# EAGLE board PCB_V1 (EAGLE 9.6.2)
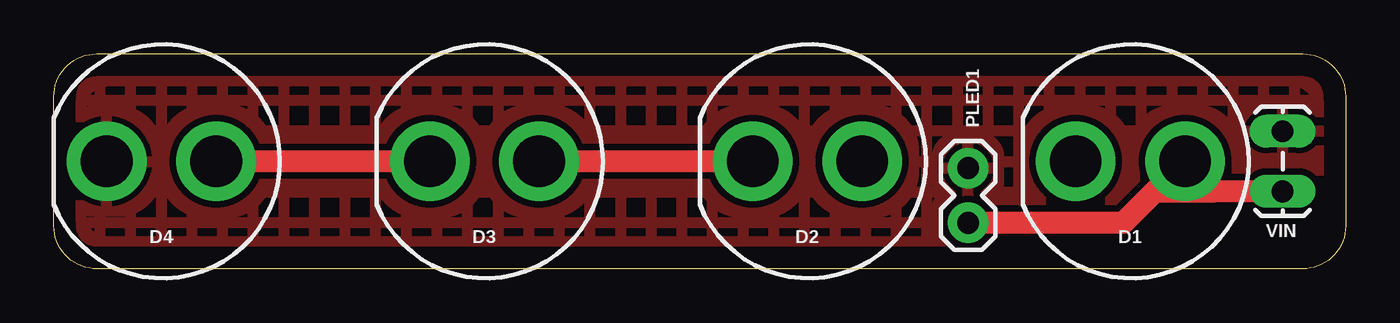
[diagram p0: board, top side]
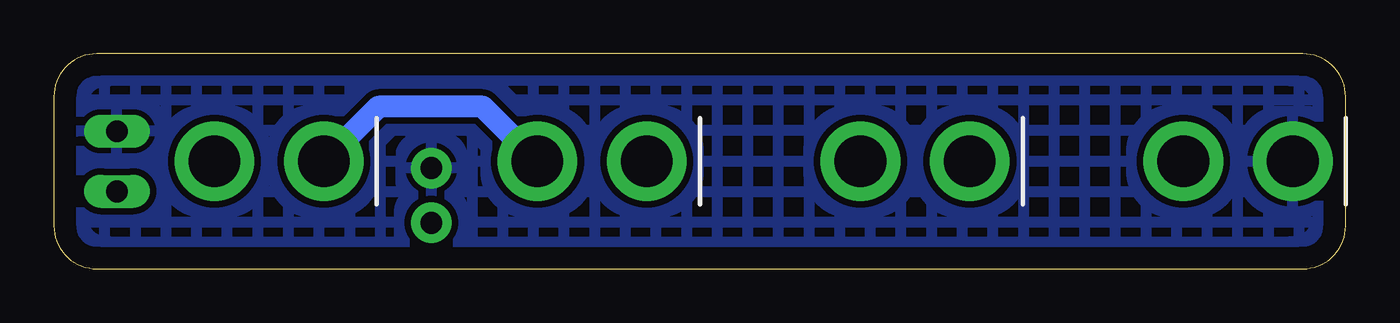
[diagram p1: board, bottom side, seen from below]

Size 60 x 10 mm. Coordinates in mm from the lower left corner, seen from the top.
Outline: 2,10 58,10 arc-90 60,8 60,2 arc-90 58,0 2,0 arc-90 0,2 0,8 arc-90 2,10
Copper layers (1*16): Top 0.035mm / dielectric 1.5mm / Bottom 0.035mm
Design rules "default": minimum track width 6mil, minimum drill 0.35mm, track to track 6mil, track to pad 6mil, pad to pad 6mil, via to via 6mil, smd to smd 6mil, copper to edge 40mil, drill to drill 6mil, minimum pad ring 10mil, minimum via ring 8mil, stop-mask expansion 4mil, vias tented up to drill 0mil, thermal gap 10mil

## Footprints (pad centres in the part's own frame; a part is rotated, then mirrored left to right if it is on the bottom)
LED_10MM = drill 2.4 pad 3.7: A 2.54,0; C -2.54,0
1X02 = drill 1.016 pad 1.88: 1 0,0; 2 2.54,0
1X02_LOCK_LONGPADS = drill 1.016 long: 1 -0.127,0; 2 2.667,0

## Placement (x,y rotation side)
D1  [LED_10MM]  50,5 0 top
D2  [LED_10MM]  35,5 0 top
D3  [LED_10MM]  20,5 0 top
D4  [LED_10MM]  5,5 0 top
PLED1  [1X02]  42.47,2.14 90 top
VIN  [1X02_LOCK_LONGPADS]  57.07,3.73 90 top

## Library data of the parts
D1-D4 = SparkFun-LED
PLED1 VIN = SparkFun-Connectors

## Nets
GND: D4.C PLED1.2 VIN.2
N$1: D1.C D2.A
N$2: D2.C D3.A
N$3: D3.C D4.A
VCC: D1.A PLED1.1 VIN.1

## Tracks (layer width: path | path; a pad name or v marks a point on that pad's centre or on a via)
GND
  pour Top (isolate 0.305, hatched): -1,11 61,11 61,-1 -1,-1
  pour Bottom (isolate 0.305, hatched): -3,13 63,13 63,-3 -3,-3
N$1
  Bottom 1.016: D2.A 40.08,7.54 44.92,7.54 D1.C
N$2
  Top 1.016: D2.C D3.A
N$3
  Top 1.016: D3.C D4.A
VCC
  Top 1.016: VIN.1 53.94,3.6 | 53.94,3.6 D1.A | D1.A 51.14,3.6 | 51.14,3.6 49.68,2.14 PLED1.1 | 51.14,3.6 51.99,3.6 | 51.99,3.6 53.94,3.6 | D1.A 52.54,4.15 51.99,3.6